# Altium PCB AUX_SteeringWheel_v4.PcbDoc
Units mil, origin at the board's own origin, x right, y up, seen from the top; angles counter-clockwise.
Board outline 6882 x 5290 mil, 2 copper layers (Top Layer, Bottom Layer); 41 components, 43 nets, 238 pads, 57 vias.
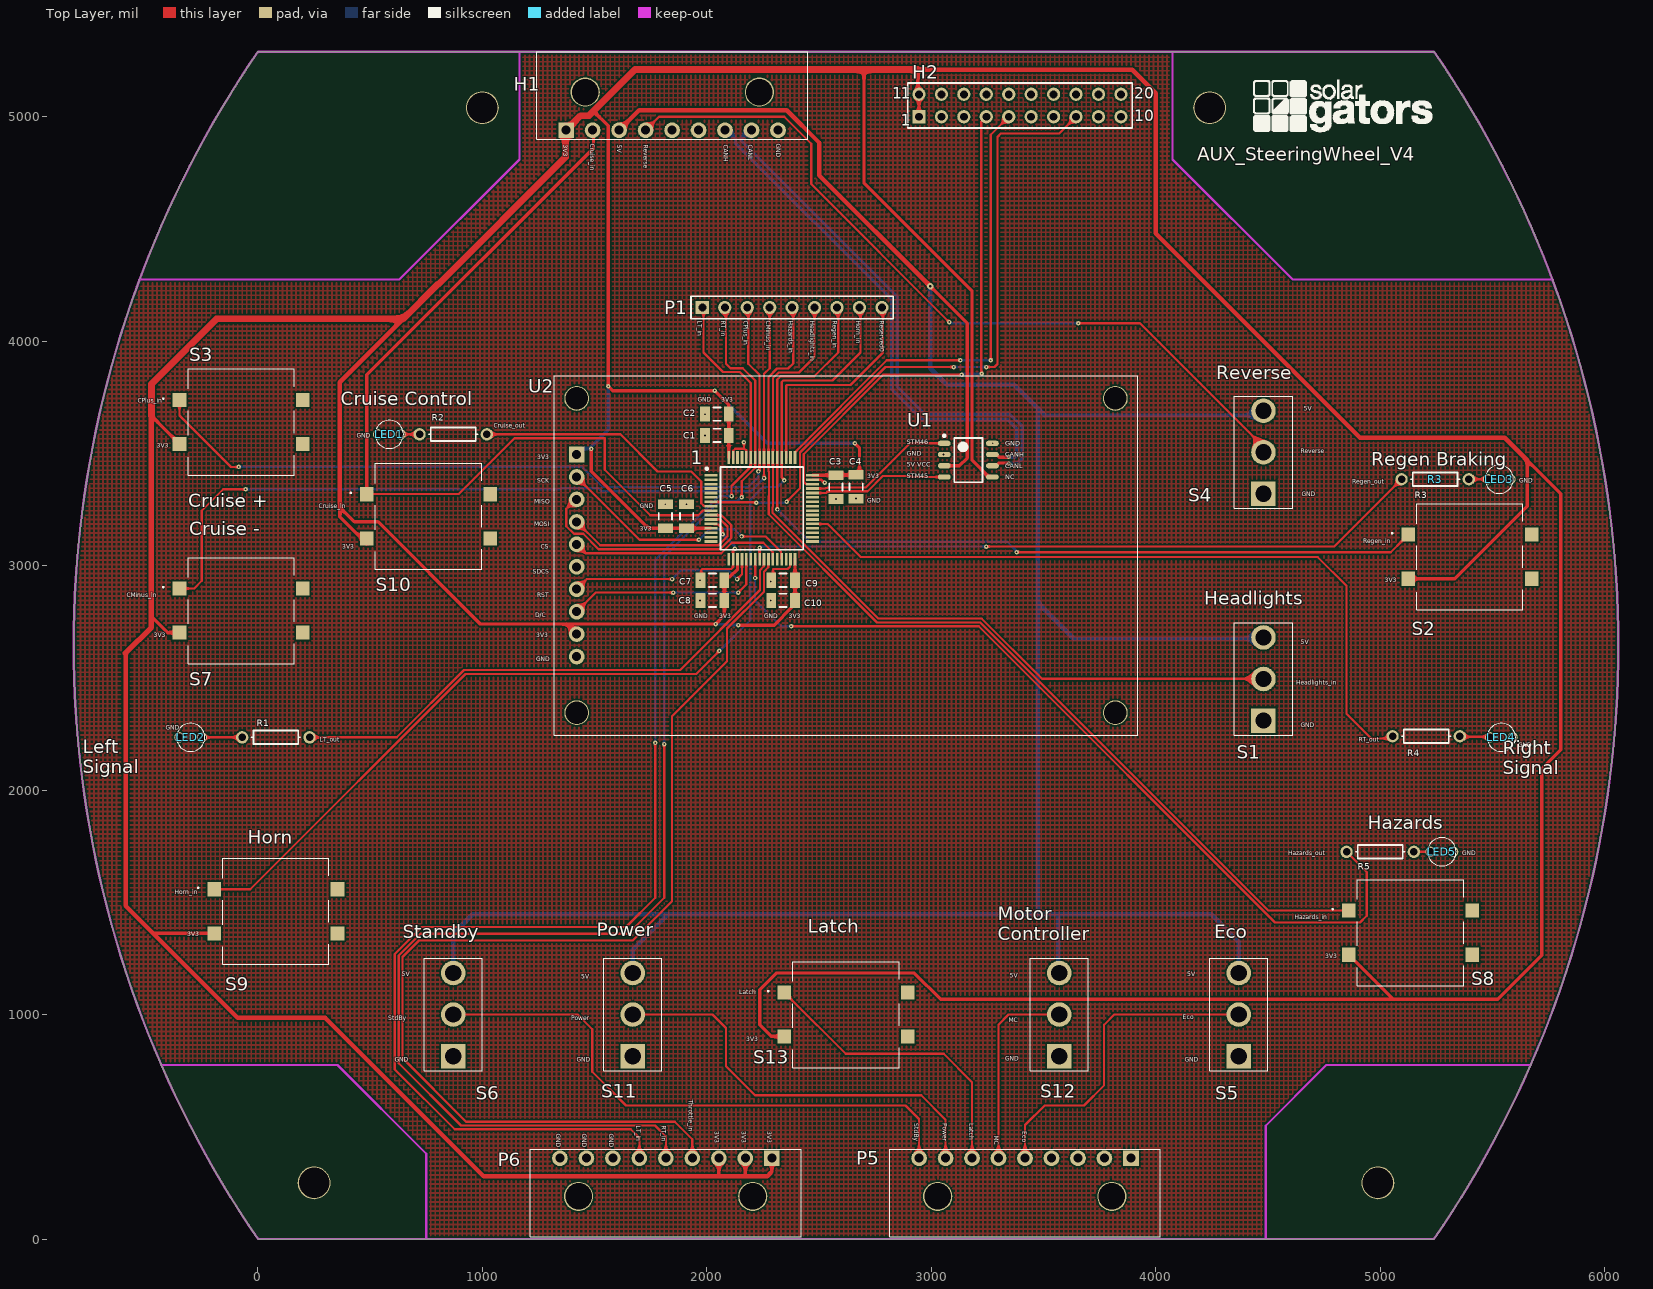
[diagram p0: Top Layer view]
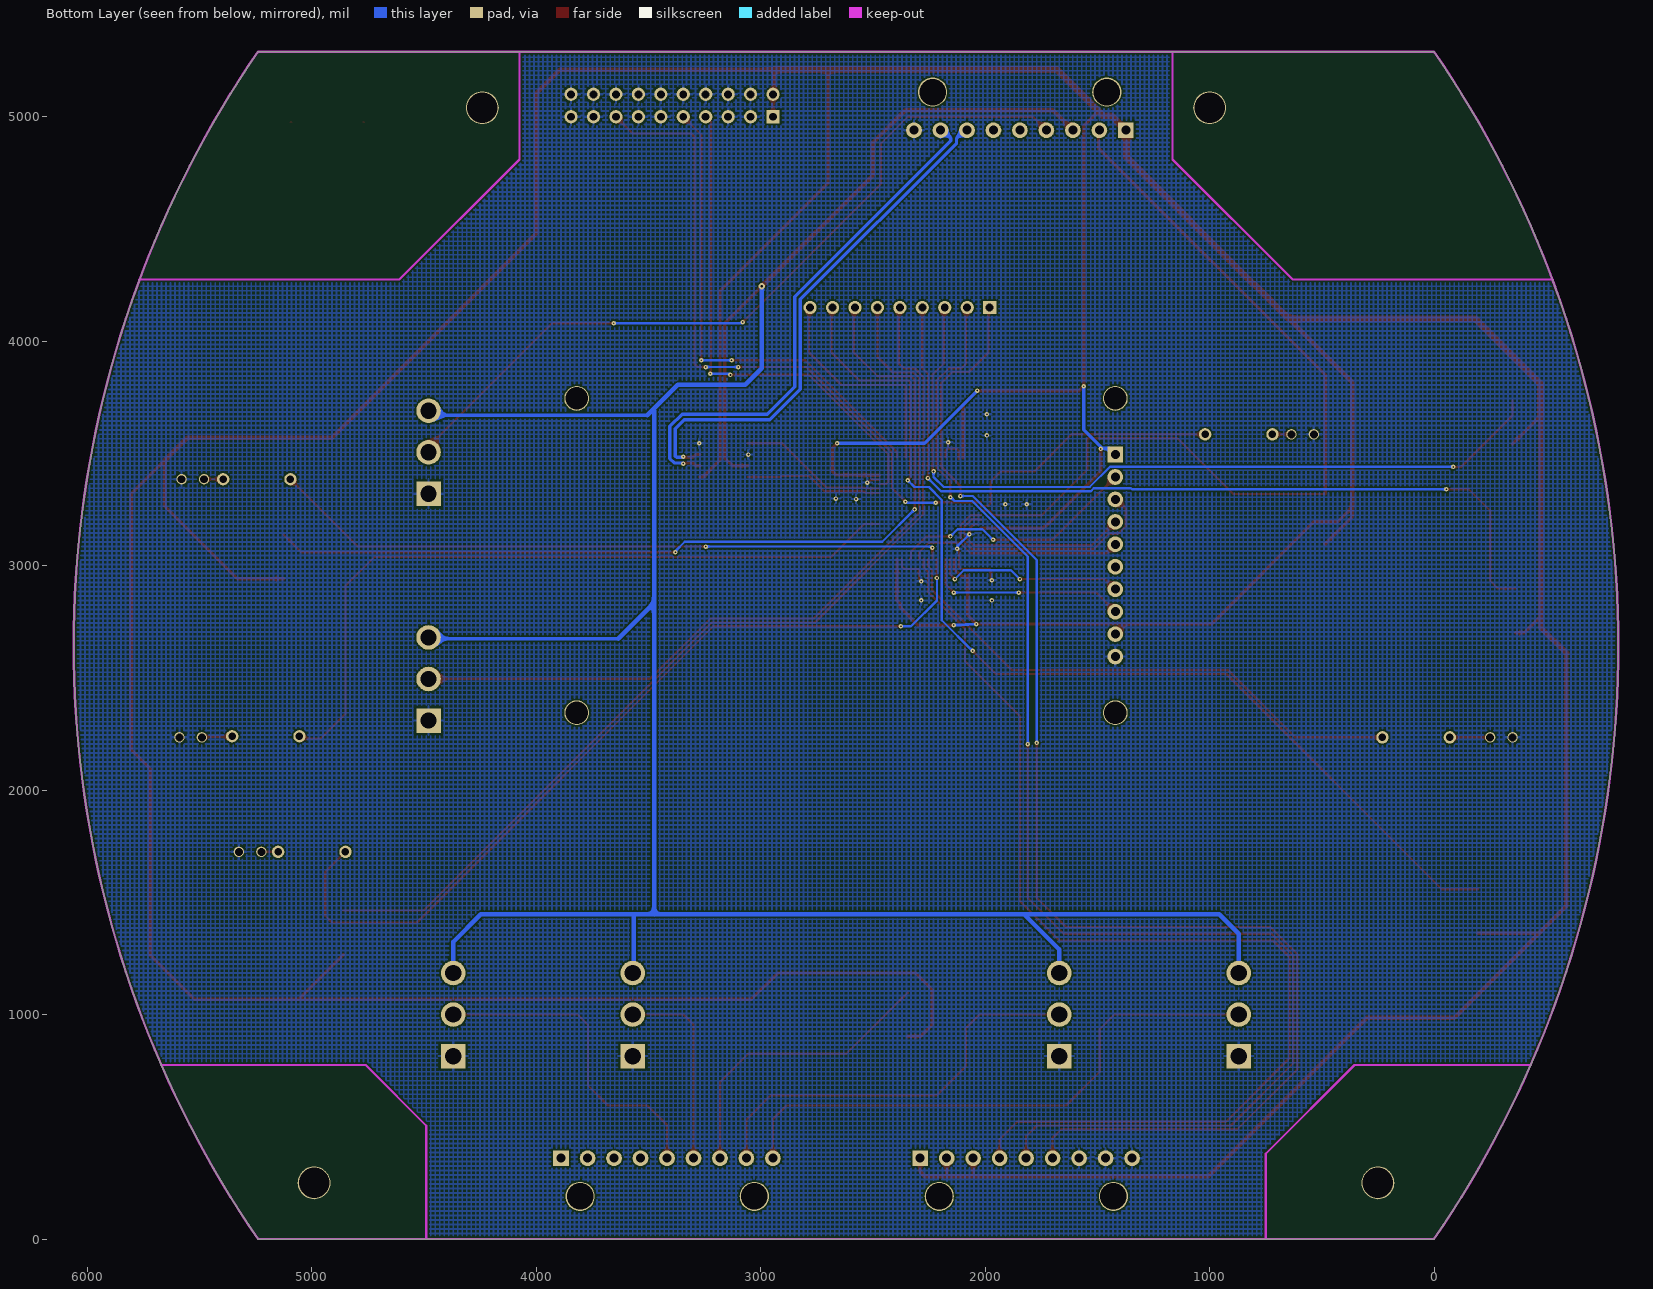
[diagram p1: Bottom Layer view, seen from below]

## Layer stack, top to bottom
Top Solder: solder mask 0.4, Solder Resist, Dk 3.5
Top Layer: signal copper 1.4
Dielectric 1: dielectric 12.6, FR-4, Dk 4.8
Bottom Layer: signal copper 1.4
Bottom Solder: solder mask 0.4, Solder Resist, Dk 3.5

## Board outline
0,0 5240,0 5239.83,0.12 ccw(c1391,2645) 5239.83,5289.88 5240,5290 0.25,5290 ccw(c3849,2645)

## Design rules (kind name [scope] priority, off if disabled: settings)
Clearance [All] p1: gap=7 ignorepadtopadclearanceinfootprint=FALSE except(6: Arc-SMDPad Arc-THPad Track-SMDPad Track-THPad)
ComponentClearance [InComponent('U2')] p1: gap=0 collisioncheckmode=3 verticalgap=10 showdistances=FALSE
DiffPairsRouting [All] p1: maxlimit=10 minlimit=10 mostfreqgap=10 toplayer_minwidth=15 toplayer_maxwidth=15 toplayer_prefwidth=15 bottomlayer_minwidth=15 bottomlayer_maxwidth=15 bottomlayer_prefwidth=15 maxuncoupledlength=500
Height [All] p1: minheight=0 maxheight=2000 prefheight=500
HoleSize [All] p1: absolutevalues=TRUE maxlimit=200 minlimit=1 maxpercent=80.000 minpercent=20.000
PolygonConnect [InNet('GND') vs InNet('GND')] p1: connectstyle=Relief reliefconductorwidth=10 reliefentries=4 polygonreliefangle="90 Angle" airgapwidth=10
RoutingVias [All] p1: holewidth=28 width=50 viastyle="Through Hole" minholewidth=28 minwidth=50 maxholewidth=28 maxwidth=50
SolderMaskExpansion [All] p1: expansion=4 istentingtop=FALSE
Width [All] p1: maxlimit=30 minlimit=10 preferedwidth=10 bottomlayer_maxwidth=20 minimp=50.000000 maximp=50.000000 favimp=50.000000
26 further rules are at their usual default settings.

## Classes and differential pairs
differential pair CAN: +CAN_P -CAN_N

## Components (designator, comment, footprint, x,y, rotation, side; value= is the part's Value field where it differs from the comment)
1 "STM32F072RBT6" QFP50P1200X1200X160-64N 2245,3255 r0 top
C1 "Cap Semi" C1206 2045,3580 r180 top value=100pF
C2 "Cap Semi" C1206 2045,3675 r180 top value=100pF
C3 "Cap Semi" C1206 2575,3350 r90 top value=100pF
C4 "Cap Semi" C1206 2665,3351.85 r90 top value=100pF
C5 "Cap Semi" C1206 1815,3220 r90 top value=100pF
C6 "Cap Semi" C1206 1910,3220 r90 top value=100pF
C7 "Cap Semi" C1206 2025,2935 r180 top value=100pF
C8 "Cap Semi" C1206 2025,2845 r180 top value=100pF
C9 "Cap Semi" C1206 2340,2935 r0 top value=100pF
C10 "Cap Semi" C1206 2340,2845 r0 top value=100pF
H1 "9-Pin Connector" Rt_Angle_9-Pin 1242.5,4900 r0 top
H2 "Header 10X2A" HDR2X10_CEN 2945,5000 r0 top
LED1 "SML-LXIL0603SIC-TR" "LED thru hole" 635.59,3585 r90 top locked
LED2 "SML-LXIL0603SIC-TR" "LED thru hole" -250,2235 r90 top locked
LED3 "SML-LXIL0603SIC-TR" "LED thru hole" 5480,3385 r270 top locked
LED4 "SML-LXIL0603SIC-TR" "LED thru hole" 5490,2235 r270 top locked
LED5 "SML-LXIL0603SIC-TR" "LED thru hole" 5225,1725 r270 top locked
P1 "Header 9" HDR1X9 1980,4150 r0 top
P5 "Header 9" Rt_Angle_9-Pin 4020,400 r180 top locked
P6 "Header 9" Rt_Angle_9-Pin 2420,400 r180 top locked
R1 "Res1" AXIAL-0.3 80,2235 r180 top value=1K
R2 "Res1" AXIAL-0.3 870,3585 r180 top value=1K
R3 "Res1" AXIAL-0.3 5245,3385 r0 top value=1K
R4 "Res1" AXIAL-0.3 5205,2240 r0 top value=1K
R5 "Res1" AXIAL-0.3 5000,1725 r0 top value=1K
S1 "SPST_1_A" 2M1SP3T1B1M2QE 4480,2310 r90 top locked
S2 "101-0624-EV" 1010624EV 5400,3040 r0 top
S3 "101-0624-EV" 1010624EV -75,3640 r0 top locked
S4 "SPST_1_A" 2M1SP3T1B1M2QE 4480,3320 r90 top locked
S5 "SPST_1_A" 2M1SP3T1B1M2QE 4370,815 r90 top locked
S6 "SPST_1_A" 2M1SP3T1B1M2QE 870,815 r90 top locked
S7 "101-0624-EV" 1010624EV -75,2800 r0 top locked
S8 "101-0624-EV" 1010624EV 5135,1365 r0 top
S9 "101-0624-EV" 1010624EV 80,1460 r0 top locked
S10 "101-0624-EV" 1010624EV 760,3220 r0 top locked
S11 "SPST_1_A" 2M1SP3T1B1M2QE 1670,815 r90 top locked
S12 "SPST_1_A" 2M1SP3T1B1M2QE 3570,815 r90 top locked
S13 "101-0624-EV" 1010624EV 2620,1000 r0 top locked
U1 "IC CAN TRANSCEIVER" "CAN TRANSCEIVER" 3165,3470 r0 top
U2 "LCD_Screen" LCD_Screen 1320,3845 r270 top locked

## Footprints (in the part's own frame and the unit in brackets; to place one, negate y for a bottom-side part, rotate by r counter-clockwise, add the part's x,y. Pads: shape width x height; smd on the part's side, far side on the other; paste and mask are expansions set on the pad)
2M1SP3T1B1M2QE [mm]
  rect 2.775x2.775 hole 1.85: 1(0,0)
  round 2.775 hole 1.85: 2(4.7,0) 3(9.4,0)
  silkscreen extent -1.65,-3.3 11.05,3.3, body extent -1.65,-3.3 11.05,3.3, height 28.2
1010624EV [mm]
  rect 1.55x1.6 smd: T1(-6.975,2.5) T2(6.975,2.5) T3(-6.975,-2.5) T4(6.975,-2.5)
  silkscreen extent -8.85,-6 6,6
AXIAL-0.3 [mm] "Axial Device, Thru-Hole; 2 Leads; 0.3 in Pin Spacing"
  round 1.4 hole 0.85: 1(-3.81,0) 2(3.81,0)
  silkscreen extent -2.77,-0.76 2.77,0.76
C1206 [mm] "Chip Capacitor, Body 3.2x1.6mm, IPC High Density"
  rect 1.1x1.7 smd: 1(-1.35,0) 2(1.35,0)
  silkscreen extent -0.4,-0.75 0.4,0.75, body extent -1.7,-0.9 1.7,0.9, height 1.3
"CAN TRANSCEIVER" [mm] "SOIC, 8-Leads, Body 4.91x3.90mm, Pitch 1.27mm, IPC Medium Density"
  oval 1.45x0.6 smd: 1(-2.725,1.905) 2(-2.725,0.635) 3(-2.725,-0.635) 4(-2.725,-1.905) 5(2.725,-1.905) 6(2.725,-0.635) 7(2.725,0.635) 8(2.725,1.905)
  silkscreen extent -2.85,-2.5 1.6,2.88, body extent -2,-2.5 2,2.5, height 1.75
HDR1X9 [mm] "Connector; Header; 9 Position"
  rect 1.5x1.5 hole 0.9: 1(0,0)
  round 1.5 hole 0.9: 2(2.54,0) 3(5.08,0) 4(7.62,0) 5(10.16,0) 6(12.7,0) 7(15.24,0) 8(17.78,0) 9(20.32,0)
  silkscreen extent -1.27,-1.27 21.59,1.27
HDR2X10_CEN [mm] "Connector; Header; 10x2 Position"
  rect 1.5x1.5 hole 0.9: 1(0,0)
  round 1.5 hole 0.9: 2(2.54,0) 3(5.08,0) 4(7.62,0) 5(10.16,0) 6(12.7,0) 7(15.24,0) 8(17.78,0) 9(20.32,0) 10(22.86,0) 11(0,2.54) 12(2.54,2.54) 13(5.08,2.54) 14(7.62,2.54) 15(10.16,2.54) 16(12.7,2.54) 17(15.24,2.54) 18(17.78,2.54) 19(20.32,2.54) 20(22.86,2.54)
  silkscreen extent -1.27,-1.27 24.13,3.81
LCD_Screen [mil]
  rect 70x70 hole 40: 1(350,100)
  round 70 hole 40: 2(450,100) 3(550,100) 4(650,100) 5(750,100) 6(850,100) 7(950,100) 8(1050,100) 9(1150,100) 10(1250,100)
  round 110 hole 100 unplated: P$1(100,100) P$2(1500,100) P$3(1500,2500) P$4(100,2500)
  silkscreen extent 0,0 1600,2600
"LED thru hole" [mil] "WP710A10QBC/D or WP7113LVBC/D"
  round 46 hole 35.43: 1(0,0) 2(0,100)
  silkscreen extent -63,-13 63,113
QFP50P1200X1200X160-64N [mm]
  rect 1.45x0.3 smd: 1(-5.75,3.75) 2(-5.75,3.25) 3(-5.75,2.75) 4(-5.75,2.25) 5(-5.75,1.75) 6(-5.75,1.25) 7(-5.75,0.75) 8(-5.75,0.25) 9(-5.75,-0.25) 10(-5.75,-0.75) 11(-5.75,-1.25) 12(-5.75,-1.75) 13(-5.75,-2.25) 14(-5.75,-2.75) 15(-5.75,-3.25) 16(-5.75,-3.75) 33(5.75,-3.75) 34(5.75,-3.25) 35(5.75,-2.75) 36(5.75,-2.25) 37(5.75,-1.75) 38(5.75,-1.25) 39(5.75,-0.75) 40(5.75,-0.25) 41(5.75,0.25) 42(5.75,0.75) 43(5.75,1.25) 44(5.75,1.75) 45(5.75,2.25) 46(5.75,2.75) 47(5.75,3.25) 48(5.75,3.75)
  rect 0.3x1.45 smd: 17(-3.75,-5.75) 18(-3.25,-5.75) 19(-2.75,-5.75) 20(-2.25,-5.75) 21(-1.75,-5.75) 22(-1.25,-5.75) 23(-0.75,-5.75) 24(-0.25,-5.75) 25(0.25,-5.75) 26(0.75,-5.75) 27(1.25,-5.75) 28(1.75,-5.75) 29(2.25,-5.75) 30(2.75,-5.75) 31(3.25,-5.75) 32(3.75,-5.75) 49(3.75,5.75) 50(3.25,5.75) 51(2.75,5.75) 52(2.25,5.75) 53(1.75,5.75) 54(1.25,5.75) 55(0.75,5.75) 56(0.25,5.75) 57(-0.25,5.75) 58(-0.75,5.75) 59(-1.25,5.75) 60(-1.75,5.75) 61(-2.25,5.75) 62(-2.75,5.75) 63(-3.25,5.75) 64(-3.75,5.75)
  silkscreen extent -6.35,-4.68 4.68,4.68, body extent -6,-6 6,6, height 1.6
Rt_Angle_9-Pin [mil]
  rect 70x70 hole 40: 1(130.5,40)
  round 70 hole 40: 2(248.5,40) 3(366.5,40) 4(484.5,40) 5(602.5,40) 6(720.5,40) 7(838.5,40) 8(956.5,40) 9(1074.5,40)
  round 130 hole 118: P$1(215.5,210) P$2(991.5,210)
  silkscreen extent 0,0 1206,390

## Part data
1: "Integrated Circuit", Manufacturer_Name=STMicroelectronics, Mouser Part Number=511-STM32F072RBT6, Datasheet Link=https://componentsearchengine.com/Datasheets/1/STM32F072RBT6.pdf, Height=1.6mm, Manufacturer_Part_Number=STM32F072RBT6, Mouser Price/Stock=https://www.mouser.com/Search/Refine.aspx?Keyword=511-STM32F072RBT6
C1 C2 C3 C4 C5 C6 C7 C8 C9 C10: "Capacitor (Semiconductor SIM Model)", LatestRevisionDate=29-May-2009, LatestRevisionNote="IPC-7351 Footprint Added.", PackageDescription="Chip Capacitor", PackageReference=C1206, Published=8-Jun-2000, Publisher="Altium Limited"
H2: "Header, 10-Pin, Dual row", LatestRevisionDate=17-Jul-2002, LatestRevisionNote="Re-released for DXP Platform.", Publisher="Altium Limited"
LED1 LED2 LED4: "Cruise", Manufacturer_Name=Lumex, Mouser2 Part Number=696-SMLLXIL0603SICTR, ComponentLink1Description=Red, ComponentLink1URL=https://www.mouser.com/ProductDetail/Lumex/SML-LXIL0603SIC-TR?qs=sGAEpiMZZMseGfSY3csMkdgyOOAg6kv2wBhnt1KKZ0Ir1Jo46E1V3Q%3D%3D, ComponentLink2Description=Green, ComponentLink2URL=https://www.mouser.com/ProductDetail/Lumex/SML-LXIL0603UPGCTR?qs=sGAEpiMZZMseGfSY3csMkdgyOOAg6kv2sRjHcnaWQfp%2F9Np9qK5zmw%3D%3D, ComponentLink3Description=Blue, ComponentLink3URL=https://www.mouser.com/ProductDetail/Lumex/SML-LXIL0603USBCTR?qs=sGAEpiMZZMseGfSY3csMkdgyOOAg6kv2YTCj%2FpdrnHQXx1e9lymIRQ%3D%3D, Datasheet Link=https://componentsearchengine.com/Datasheets/1/SML-LXIL0603SIC-TR.pdf, Height=1.15mm, Manufacturer_Part_Number=SML-LXIL0603SIC-TR, Mouser2 Price/Stock=https://www.mouser.com/Search/Refine.aspx?Keyword=696-SMLLXIL0603SICTR
LED3: "Headlights", Manufacturer_Name=Lumex, Mouser2 Part Number=696-SMLLXIL0603SICTR, ComponentLink1Description=Red, ComponentLink1URL=https://www.mouser.com/ProductDetail/Lumex/SML-LXIL0603SIC-TR?qs=sGAEpiMZZMseGfSY3csMkdgyOOAg6kv2wBhnt1KKZ0Ir1Jo46E1V3Q%3D%3D, ComponentLink2Description=Green, ComponentLink2URL=https://www.mouser.com/ProductDetail/Lumex/SML-LXIL0603UPGCTR?qs=sGAEpiMZZMseGfSY3csMkdgyOOAg6kv2sRjHcnaWQfp%2F9Np9qK5zmw%3D%3D, ComponentLink3Description=Blue, ComponentLink3URL=https://www.mouser.com/ProductDetail/Lumex/SML-LXIL0603USBCTR?qs=sGAEpiMZZMseGfSY3csMkdgyOOAg6kv2YTCj%2FpdrnHQXx1e9lymIRQ%3D%3D, Datasheet Link=https://componentsearchengine.com/Datasheets/1/SML-LXIL0603SIC-TR.pdf, Height=1.15mm, Manufacturer_Part_Number=SML-LXIL0603SIC-TR, Mouser2 Price/Stock=https://www.mouser.com/Search/Refine.aspx?Keyword=696-SMLLXIL0603SICTR
LED5: "Hazards", Manufacturer_Name=Lumex, Mouser2 Part Number=696-SMLLXIL0603SICTR, ComponentLink1Description=Red, ComponentLink1URL=https://www.mouser.com/ProductDetail/Lumex/SML-LXIL0603SIC-TR?qs=sGAEpiMZZMseGfSY3csMkdgyOOAg6kv2wBhnt1KKZ0Ir1Jo46E1V3Q%3D%3D, ComponentLink2Description=Green, ComponentLink2URL=https://www.mouser.com/ProductDetail/Lumex/SML-LXIL0603UPGCTR?qs=sGAEpiMZZMseGfSY3csMkdgyOOAg6kv2sRjHcnaWQfp%2F9Np9qK5zmw%3D%3D, ComponentLink3Description=Blue, ComponentLink3URL=https://www.mouser.com/ProductDetail/Lumex/SML-LXIL0603USBCTR?qs=sGAEpiMZZMseGfSY3csMkdgyOOAg6kv2YTCj%2FpdrnHQXx1e9lymIRQ%3D%3D, Datasheet Link=https://componentsearchengine.com/Datasheets/1/SML-LXIL0603SIC-TR.pdf, Height=1.15mm, Manufacturer_Part_Number=SML-LXIL0603SIC-TR, Mouser2 Price/Stock=https://www.mouser.com/Search/Refine.aspx?Keyword=696-SMLLXIL0603SICTR
P1 P5 P6: "Header, 9-Pin", LatestRevisionDate=17-Jul-2002, LatestRevisionNote="Re-released for DXP Platform.", Publisher="Altium Limited"
R1 R2 R3 R4 R5: "Resistor", LatestRevisionDate=17-Jul-2002, LatestRevisionNote="Re-released for DXP Platform.", PackageDescription="Axial Device, Thru-Hole; 2 Leads; 0.3 in Pin Spacing", PackageReference=AXIAL-0.3, Published=8-Jun-2000, Publisher="Altium Limited"
S1 S4 S5 S6 S11 S12: library part 2M1-SP1-T1-B1-M2QE, "Switch", Manufacturer_Name="Carling Technologies", Mouser Part Number=691-2M1-SP1-T1B1M2QE, Datasheet Link=https://componentsearchengine.com/Datasheets/1/2M1-SP1-T1-B1-M2QE.pdf, Height=28.2mm, Manufacturer_Part_Number=2M1-SP1-T1-B1-M2QE, Mouser Price/Stock=https://www.mouser.com/Search/Refine.aspx?Keyword=691-2M1-SP1-T1B1M2QE
S2 S3 S7 S8 S9 S10 S13: "Switch", Manufacturer_Name="Mountain Switch", Datasheet Link=https://componentsearchengine.com/Datasheets/1/101-0624-EV.pdf, Height=7.3mm, Manufacturer_Part_Number=101-0624-EV, Mouser Part Number=101-0624-EV, Mouser Price/Stock=https://www.mouser.com/Search/Refine.aspx?Keyword=101-0624-EV
U1: library part "CAN TRANSCEIVER"
U2: "LCD Display Screen"

## Free pads (board coordinates)
  round 146 hole 136: P$3(1000,5040) P$4(4240,5040) P$5(4990,250) P$6(250,250)

## Via types
v1: diameter 20, hole 8, Top Layer to Bottom Layer, 50 vias
v2: diameter 20, hole 7.87, Top Layer to Bottom Layer, 6 vias
v3: diameter 30, hole 10, Top Layer to Bottom Layer, 1 vias

## Nets (pads, with @x,y where several pads share a name; then routed paths per layer and width w, separated by ;. In a path a pad name is that pad's centre, name@x,y a point inside that pad or via, vN(x,y) a via of type N, cw(c..) or ccw(c..) an arc to the next point about the centre after c; other vN are vias at no path point)
3V3: 1.13 1.19 1.32 1.48 1.64 C1.1 C2.1 C3.2 C4.2 C5.1 C6.1 C7.1 C8.1 C9.2 C10.2 H1.1 H2.1 H2.11 P6.1 P6.2 P6.3 S2.T3 S3.T3 S7.T3 S8.T3 S9.T3 S10.T3 S13.T3 U1.5 U2.1 U2.9 | length 32479.8
  Top Layer w13: 2136.73,2983.79 1.19
  Top Layer w15: -475,2835 -470,2830 -470,2770 -401.57,2701.57 S7.T3@-364.61,2701.57 ; -475,3667.95 -349.61,3542.56 S3.T3 ; -465,1360 -463.43,1361.57 S9.T3 ; 362.5,3262.5 365,3260 ; S10.T3@485.39,3097.56 365,3217.95 365,3260 ; U2.9 1375,2740 ; v1(1485,3520) 1485,3420 1730,3175 1735,3175 1743.15,3166.85 C6.1 1910.22,3166.63 2018.41,3166.63 1.13 ; 1494.81,5025.19 1560.5,4959.5 v1(1560.5,3799.5) 1580,3780 v1(2035,3780) 2097.89,3717.11 C2.1@2097.89,3687.07 ; P6.3 2053.5,281.5 2055,280 ; 1.64 2097.64,3481.66 2097.64,3569.49 2098.15,3570 C2.1 C2.1@2097.89,3675.26 ; 2136.73,2983.79 2102.95,2950 2084.96,2950 2078.15,2956.81 2078.15,2950 C7.1 2078.15,2850 2078.15,2778.15 v1(2040,2740) 1410,2740 1375,2740 ; v1(2140,2735) 2300,2735 2379,2814 2379,2830.85 C10.2 C9.2 2392.89,2935.26 2392.89,3028.37 1.32 ; P6.2 2171.5,283.5 2175,280 ; 2285,295 2289.5,299.5 P6.1 ; S13.T3 2345.39,902.56 2286.23,902.56 2235,953.79 2235,1110 2310,1185 2925,1185 3041.83,1068.17 5057.82,1068.17 ; 1.48@2471.89,3403.15 2493.71,3403.15 2493.8,3403.24 2505.81,3403.24 2505.89,3403.15 C3.2 2575.93,3404.07 2664.92,3404.07 2680,3419.15 2680,3525 v1(2660,3545) ; 2700,5210 2700,4705 3181.5,4223.5 3181.5,3469.05 3255.55,3395 U1.5 ; 2940,5210 2940,5105 H2.11 H2.1 ; S8.T3 4860.39,1265.59 5057.82,1068.17 ; S2.T3 5331.57,2941.57 5655,3265 5655,3470 5805,3320 5805,2180 5720,2095 5720,1265 5523.17,1068.17 5057.82,1068.17 ; 365,3260 430,3195 535,3195 990,2740 1375,2740
  Top Layer w20: -590,2610 -590,1485 -465,1360 -90,985 300,985 1005,280 2055,280 2175,280 2270,280 2285,295 ; 365,3260 365,3800 364.78,3800.22 364.78,3816.78 647.5,4099.5 ; S10.T3@485.39,3096.57 S10.T3@485.39,3097.56 ; C2.1@2097.89,3675.26 C2.1@2097.89,3687.07 ; 2940,5210 3895,5210 4000,5105 4000,4480 4910,3570 5555,3570 5655,3470
  Top Layer w25: -590,2610 -475,2725 -475,2770 -475,2835 -475,3667.95
  Top Layer w30: -475,3667.95 -474.5,3668.45 -474.5,3809.5 -184.5,4099.5 647.5,4099.5 800.5,4252.5 ; 801.5,4251.5 1370,4820 1370,4937 H1.1 1438,5005 1474.62,5005 1494.81,5025.19 1679.62,5210 2700,5210 2940,5210
  Bottom Layer w15: U2.1 1447.5,3522.5 1477.5,3522.5 1560,3605 1560,3799 v1(1560.5,3799.5) ; v1(2035,3780) 2270,3545 v1(2660,3545) ; v1(2040,2740) v1(2140,2735)
5V: H1.3 S1.3 S4.3 S5.3 S6.3 S11.3 S12.3 U1.3 | length 12555.5
  Top Layer w15: v3(2995,4245) 3159.5,4080.5 3159.5,3479.5 3125,3445 U1.3
  Top Layer w20: H1.3 1699,5030 2027,5030 2028,5029 2356,5029 2500,4885 2500,4740 v3(2995,4245)
  Bottom Layer w15: 3505.08,3670 4474.96,3670 S4.3@4500,3695.04 ; 3634.96,2675.04 S1.3@4480,2675.04
  Bottom Layer w20: S6.3 870,1360 956.72,1446.72 1826.72,1446.72 ; S11.3 1670,1290 1826.72,1446.72 ; v3(2995,4245) 2995,3880 3069,3806 3369.08,3806 3505.08,3670 ; 3475,3690 3475,2835 ; S12.3 3565,1190.08 3565,1446.72 ; 3634.96,2675.04 3475,2835 ; S5.3 4370,1323.43 4246.72,1446.72 3565,1446.72 ; 1826.72,1446.72 3475,1446.72 ; 3475,1446.72 3565,1446.72 ; 3475,1446.72 3475,2835
CAN_N: H1.8 U1.6 | length 2412.7
  Top Layer w15: U1.6 3289.61,3445 3302.11,3457.5 3338.96,3457.5 3341.46,3455 v1(3345,3455)
  Bottom Layer w10: H1.8@2199,4906 H1.8
  Bottom Layer w15: H1.8 2187.22,4940 2152.5,4905.28 2152.5,4892.86 2848.03,4197.33 2848.03,3796.97 2970,3675 3350.36,3675 3405,3620.36 3405,3477.14 3385.36,3457.5 3347.5,3457.5 v1(3345,3455)
CAN_P: H1.7 U1.7 | length 2337.3
  Top Layer w15: U1.7 3289.61,3495 3302.11,3482.5 3342.5,3482.5 v1(3345,3485)
  Bottom Layer w15: H1.7 2092.78,4940 2127.5,4905.28 2127.5,4882.5 2823.03,4186.97 2823.03,3786.62 2959.64,3650 3340,3650 3380,3610 3380,3487.5 3375,3482.5 3351.04,3482.5 3348.54,3485 v1(3345,3485)
CMinus_in: 1.56 P1.4 S7.T1 | length 3787.7
  Top Layer w10: S7.T1@-364.61,2898.43 S7.T1 -283.88,2898.43 -250,2932.3 -250,3245 -155,3340 v2(-55,3340) ; v2(2255,3390) 2255,3420 2254.84,3420.16 1.56 2254.84,3854.84 2280,3880 P1.4
  Bottom Layer w10: v2@-53,3342 -53,3340 1345,3340 1350,3345 1515.96,3345 1528.96,3332 2197,3332 v2(2255,3390)
CPlus_in: 1.57 P1.3 S3.T1 | length 3579.6
  Top Layer w10: S3.T1 -349.61,3669.35 -120.26,3440 v2(-85,3440) ; P1.3 2185,4145 2185,3900 2235.16,3849.84 1.57 2235.16,3425.16 v2(2230,3420)
  Bottom Layer w10: v2(-85,3440) -84,3441 1444,3441 1534,3351 2186,3351 2230,3395 v2(2230,3420)
Cruise_in: 1.9 H1.2 S10.T1 | length 3911.2
  Top Layer w10: S10.T1 485.39,3319.41 894.41,3319.41 1143,3568 1545,3568 1545,3427.36 1747.36,3225 1961.98,3225 1983.04,3246.06 2017.72,3246.06 1.9 ; H1.2 H1.2@1495,4936
  Top Layer w15: S10.T1@485.39,3319.41 485.39,3850.39 1495,4860 H1.2@1495,4936
Cruise_out: 1.8 R2.1 | length 1190.5
  Top Layer w10: R2.1 1615,3585 1780,3420 1930,3420 1975,3375 1975,3278.14 1987.4,3265.75 1.8@2016.81,3265.75 ; 1.8@2018.62,3263.94 1.8@2016.81,3265.75 ; 1.8 2017.72,3265.75 1.8@2016.81,3265.75
Eco: P5.5 S5.2 | length 1462.2
  Top Layer w10: P5.5 3417.5,507.5 3505,595 3680,595 3770,685 3770,955 3815.04,1000.04 S5.2
GND: 1.12 1.18 1.31 1.47 1.60 1.63 C1.2 C2.2 C3.1 C4.1 C5.2 C6.2 C7.2 C8.2 C9.1 C10.1 H1.9 H2.2 H2.3 H2.6 H2.7 H2.9 H2.10 H2.12 H2.13 H2.14 H2.15 H2.16 H2.17 H2.18 H2.19 H2.20 LED1.2 LED2.2 LED3.2 LED4.2 LED5.2 P6.7 P6.8 P6.9 S1.1 S4.1 S5.1 S6.1 S11.1 S12.1 U1.2 U1.8 U2.10 | length 837.1
  Top Layer w10: C7.2 1975,2938.15 1975,2979.14 1980.86,2985 2108.41,2985 2117.05,2993.64 1.18 2117.05,3067.05 v1(2125,3075) ; 1.12@2032.19,3183.32 2051.72,3183.32 2070,3165.05 v1(2070,3140) ; 1.63@2117.14,3476.11 2117.14,3511.79 2126.27,3520.92 2166.88,3520.92 ; v1(2165,3550) 2165,3522.8 2166.88,3520.92 ; 1.60 2175.2,3482.28 2175.2,3514.8 2173,3514.8 2166.88,3520.92 ; C10.1 2290,2848.15 C10.1@2290,2845 ; C9.1 2295,2943.15 2295,2983.46 2296.54,2985 2359.65,2985 2370.17,2995.52 2370.17,3025.84 1.31 ; 1.47 2509.34,3382.95 2522.29,3370 v1(2525,3370) ; v1(3055.05,3495) U1.2 ; U1.8 v1(3273.78,3545)
  Bottom Layer w10: v1(2070,3140) 2125,3085 v1(2125,3075)
  other v1: 1970,2845 2285,2845 2285,2930 1970,2935 1815,3273.15 1910,3273.15 2575,3296.85 2665,3298.7 1991.85,3580 1991.85,3675
Hazards_in: 1.55 P1.5 S8.T1 | length 4315.2
  Top Layer w10: P1.5 2385,4145 2385,3901.17 2361.79,3877.96 2312.96,3877.96 2274.53,3839.53 1.55 2274.53,3421.05 2277,3418.58 2277,3311.04 2275.45,3309.49 2275.45,3229.24 2757.69,2747 3218,2747 4501.57,1463.43 S8.T1
Hazards_out: 1.23 R5.1 | length 3837.9
  Top Layer w10: v1(2215,2945) 2215.47,2945.47 1.23 ; v1(2375,2730) 3210.96,2730 4530.96,1410 4910,1410 4940,1440 4940,1635 R5.1
  Bottom Layer w10: v1(2215,2945) 2215,2845 2330,2730 v1(2375,2730)
Headlights_in: 1.54 P1.6 S1.2 | length 3541.4
  Top Layer w10: P1.6 2480,3930 2410.96,3860.96 2320,3860.96 2294.21,3835.17 1.54 2294.21,3261.43 2292.45,3259.66 2292.45,3236.29 2764.73,2764 3225.04,2764 3493.04,2496 4474,2496 S1.2@4480,2490
Horn_in: 1.52 P1.8 S9.T1 | length 4659.4
  Top Layer w10: S9.T1 -34.61,1558.43 924.47,2517.5 1952.5,2517.5 v1(2055,2620) ; v1(2345,3380) 2345,3382.71 2333.58,3394.12 1.52 2333.58,3818.58 2340,3825 2560,3825 2685,3950 2685,4145 P1.8
  Bottom Layer w10: v1(2055,2620) 2056.11,2620 2193,2756.89 2193,3293 2250,3350 2315,3350 v1(2345,3380)
Latch: P5.7 S13.T1 | length 1340.8
  Top Layer w10: S13.T1 2345.39,1097.44 2370.91,1071.93 2371.89,1071.93 2618.82,825 3055,825 3181.5,698.5 P5.7
LCD_CS: 1.27 U2.5 | length 958.4
  Top Layer w10: U2.5 1460,3055 2064.35,3055 2111.35,3102 2251.16,3102 2293.93,3059.22 2293.93,3028.9 1.27
LCD_D/C: 1.21 U2.8 | length 918.8
  Top Layer w10: U2.8 1505,2880 v1(1850,2880) ; v1(2140,2880) 2176.1,2916.1 1.21
  Bottom Layer w10: v1(1850,2880) v1(2140,2880)
LCD_MISO: 1.10 U2.3 | length 1105.4
  Top Layer w10: U2.3 1415,3295 1374,3254 1374,3175.95 1408.28,3141.67 1449.02,3141.67 1517.23,3073.46 2058.76,3073.46 2109,3123.69 2109,3180.97 2065.4,3224.57 2019.53,3224.57 1.10
LCD_MOSI: 1.11 U2.4 | length 863.5
  Top Layer w10: U2.4 1524.54,3090.46 2051.72,3090.46 2092,3130.73 2092,3173.93 2058.93,3207 2031.83,3207 2029.71,3204.88 2019.53,3204.88 1.11
LCD_RST: 1.20 U2.7 | length 864
  Top Layer w10: U2.7 1465,2940 v1(1845,2940) ; v1(2135,2940) 2156.23,2961.23 ; 2156.42,2961.42 1.20
  Bottom Layer w10: v1(1845,2940) 1885,2980 2095,2980 v1(2135,2940)
LCD_SCK: 1.29 U2.2 | length 1123.2
  Top Layer w10: U2.2 1700,3115 v2(1965,3115) ; v2(2155,3130) 2262.53,3130 2330.8,3061.72 2330.8,3034.24 2335,3030.04 1.29
  Bottom Layer w10: v2(1965,3115) 2012,3162 2123,3162 v2(2155,3130)
LT_in: 1.59 P1.1 P6.6 | length 6056.6
  Top Layer w10: P6.6 1699.5,450.5 1661.39,488.61 876.39,488.61 610.02,754.98 610.02,1270.02 730,1390 1640,1390 1770,1520 v1(1770,2210) ; P1.1 1985,4145 1985,3950 2072,3863 2147,3863 2195.79,3814.21 1.59 2194.88,3480.47 2194.88,3440.04 2110,3355.15 v1(2110,3310)
  Bottom Layer w10: v1(1770,2210) 1770,3025 2055,3310 v1(2110,3310)
LT_out: 1.25 R1.1 | length 2423.8
  Top Layer w10: R1.1 617.93,2235 917.93,2535 1881.11,2535 2237.2,2891.08 2237.2,2980.06 2253.94,2996.8 2253.94,3027.72 1.25
MC: P5.6 S12.2 | length 884.2
  Top Layer w10: P5.6 3299.5,955.04 3344.5,1000.04 S12.2
NetLED1_1: LED1.1 R2.2 | length 84.4
  Top Layer w10: LED1.1 R2.2
NetLED2_1: LED2.1 R1.2 | length 180
  Top Layer w10: LED2.1 R1.2
NetLED3_1: LED3.1 R3.2 | length 85
  Top Layer w10: R3.2 LED3.1
NetLED4_1: LED4.1 R4.2 | length 137.1
  Top Layer w10: R4.2 5357.5,2237.5 5487.5,2237.5 LED4.1
NetLED5_1: LED5.1 R5.2 | length 75
  Top Layer w10: R5.2 LED5.1
NRST_pgm15: 1.7 H2.8 | length 3026.9
  Top Layer w10: 1.7 2020.15,3283 v1@2222,3283 ; v1(2355,3285) 2414.83,3344.83 2414.83,3503.88 2795.96,3885 v1(3100,3885) ; v1(3245,3885) 3281.11,3885 3295,3898.89 3295,4910 3310,4925 3570,4925 H2.8
  Bottom Layer w10: v1(2220,3280) 2347.29,3280 2352.29,3285 v1(2355,3285) ; v1(3100,3885) v1(3245,3885)
Power: P5.8 S11.2 | length 1858.7
  Top Layer w10: S11.2 2024.96,1000.04 2085,940 2085,770 2215,640 2955,640 3063.5,531.5 P5.8
Regen_in: 1.53 P1.7 S2.T1 | length 4027.8
  Top Layer w10: v1(2314.45,3250.55) 2313.9,3251.1 1.53 2313.9,3828.9 2328.96,3843.96 2478.96,3843.96 2585,3950 2585,4145 P1.7 ; v1(3380,3060) 5046.97,3060 5098.9,3111.93 5099.88,3111.93 5125.39,3137.44 S2.T1
  Bottom Layer w10: v1(2314.45,3250.55) 2458,3107 3338,3107 3380,3065 v1(3380,3060)
Regen_out: 1.24 R3.1 | length 3037.8
  Top Layer w10: v1(2235,3080) 2235.08,3079.92 2235.08,3028.7 1.24 ; v1(3245,3085) 4795,3085 R3.1
  Bottom Layer w10: v1(2235,3080) 2240,3085 v1(3245,3085)
Reserved0: 1.51 P1.9 | length 1017.3
  Top Layer w10: 1.51@2354.17,3482.28 1.51 2353.27,3802.41 2355.86,3805 2640,3805 2785,3950 2785,4145 P1.9
Reverse: H1.4 S4.2 | length 3520.5
  Top Layer w10: H1.4 1787,5000 2345,5000 2465,4880 2465,4700 v1(3080,4085) ; v1(3655,4080) 3930,4080 S4.2@4500,3510
  Bottom Layer w10: v1(3080,4085) 3082.71,4085 3087.71,4080 v1(3655,4080)
RT_in: 1.58 P1.2 P6.5 | length 6127.7
  Top Layer w10: v1(1810,2205) 1810,1520 1650,1360 724.04,1360 627.02,1262.98 627.02,782.98 904.39,505.61 1769.39,505.61 1817.5,457.5 P6.5 ; P1.2 2085,4145 2085,3900 2105,3880 2160,3880 2215.47,3824.53 1.58 2215.47,3436.58 2155,3376.11 v1(2155,3305)
  Bottom Layer w10: v1(1810,2205) 1810,3040.96 2057.02,3287.98 2136.67,3287.98 2153.69,3305 v1(2155,3305) v1@2156.25,3303.75
RT_out: 1.37 R4.1 | length 3317.7
  Top Layer w10: 1.37 2538.9,3186.1 2687,3038 4722,3038 4850,2910 4850,2340 4960,2230 5034.81,2230 5044.81,2240 R4.1
Rx: 1.44 U1.4 | length 619.9
  Top Layer w10: 1.44 2531.37,3323.9 2536.98,3329.5 2544.66,3329.5 2546.51,3331.35 2716.35,3331.35 2785,3400 2908.65,3400 2913.65,3395 U1.4
StdBy: P5.9 S6.2 | length 2554.1
  Top Layer w10: S6.2 1424.96,1000.04 1490,935 1490,745 1640,595 2885,595 2945.5,534.5 P5.9
SWCLK_pgm9: 1.49 H2.5 | length 2184.4
  Top Layer w10: 1.49 2392.64,3504.02 2397.83,3509.21 2397.83,3510.92 2801.92,3915 v1(3130,3915) ; v1(3265,3915) 3265,4920 H2.5
  Bottom Layer w10: v1(3130,3915) v1(3265,3915)
SWDIO_pgm7: 1.46 H2.4 | length 2265.3
  Top Layer w10: 1.46 2470.47,3364.17 2440.15,3364.17 2440.15,3366.05 2438.28,3366.05 2431.83,3372.49 2431.83,3496.83 2785,3850 v1(3135,3850) ; v1(3225,3855) 3225,3857.71 3223,3859.71 3223,4978 H2.4
  Bottom Layer w10: v1(3135,3850) 3140,3855 v1(3225,3855)
Throttle_in: 1.26 P6.4 | length 4981.3
  Top Layer w10: P6.4 1935.5,444.5 1857.39,522.61 927.39,522.61 644.02,805.98 644.02,1255.94 718.08,1330 1670,1330 1845,1505 1845,2328.89 2090,2573.89 2090,2719.85 2254.2,2884.04 2254.2,2973.02 2273.62,2992.45 2273.62,3027.72 1.26
Tx: 1.45 U1.1 | length 669.8
  Top Layer w10: 1.45 2527.02,3343.58 2529.94,3346.5 2537.62,3346.5 2539.47,3348.35 2708.35,3348.35 2905,3545 U1.1
pads on no net: 1.1 1.2 1.3 1.4 1.5 1.6 1.14 1.15 1.16 1.17 1.22 1.28 1.30 1.33 1.34 1.35 1.36 1.38 1.39 1.40 1.41 1.42 1.43 1.50 1.61 1.62 H1.5 H1.6 H1.P$1 H1.P$2 P5.1 P5.2 P5.3 P5.4 P5.P$1 P5.P$2 P6.P$1 P6.P$2 S2.T2 S2.T4 S3.T2 S3.T4 S7.T2 S7.T4 S8.T2 S8.T4 S9.T2 S9.T4 S10.T2 S10.T4 S13.T2 S13.T4 U2.6 U2.P$1 U2.P$2 U2.P$3 U2.P$4

## Polygon pours and split planes (outlines as drawn)
GND on Bottom Layer "GND_L02_P064" (hatched 90Degree grid 20 track 8, remove dead copper, pour order 64): -4.77,-1.55 cw(c3849,2645) -533.85,4271.78 cw(c-530,4275) -530.81,4279.95 cw(c3849,2645) -4.77,5291.55 cw(c0,5290) 0,5295.02 5240,5295.02 cw(c5240,5290) 5244.77,5291.55 cw(c1391,2645) 5770.81,4279.95 cw(c5770,4275) 5775.02,4275 cw(c5770,4275) 5773.85,4271.78 cw(c1391,2645) 6066.02,2645 cw(c1391,2645) 5244.77,-1.55 cw(c5240,0) 5240,-5.02 0,-5.02 cw(c0,0)
no net on Top Layer "NONET_L01_P066" (hatched 90Degree grid 20 track 8, pour order 66): -4.77,-1.55 cw(c3849,2645) -533.85,4271.78 cw(c-530,4275) -530.81,4279.95 cw(c3849,2645) -4.77,5291.55 cw(c0,5290) 0,5295.02 5240,5295.02 cw(c5240,5290) 5244.77,5291.55 cw(c1391,2645) 5770.81,4279.95 cw(c5770,4275) 5775.02,4275 cw(c5770,4275) 5773.85,4271.78 cw(c1391,2645) 6066.02,2645 cw(c1391,2645) 5244.77,-1.55 cw(c5240,0) 5240,-5.02 0,-5.02 cw(c0,0)

## Keep-outs
Keep-Out Layer:
  lines w10: -530,4275 630,4275 1165,4810 1165,5290 ; -430,775 355,775 750,380 750,0 ; -280,775 -275,775 ; 0,0 5240,0 ; 0,5290 5240,5290 ; 0.17,0.12 cw(c3849,2645) 0.25,5290 ; 4075,5290 4075,4810 4610,4275 5770,4275 ; 4490,0 4490,500 4490,505 4750,765 4760,775 5670,775 ; 5239.83,0.12 ccw(c1391,2645) 5239.83,5289.88

## Other copper
Top Layer:
  pour cut-out: -430,775 355,775 750,380 750,0 -0.12,0.12 -315,315
  pour cut-out: 5239.83,0.12 5239.71,0 4490,0 4490,500 4760,770 4760,775 5670,775 5660,765 5660,590
  pour cut-out: 4075,5290 4075,4810 4610,4275 5770.63,4275 5770,4275.63 5770,4835 5694.71,4835 5239.83,5289.88
  pour cut-out: -527.3,4275 630,4275 1165,4810 1165,5290 -70,5290 -220,5140

## Silkscreen, mask and mechanical layers (free items; w line width, h text height)
Top Overlay:
  drawing of 2658 lines, arcs and shapes, not listed
  text "Cruise_in" at 1480,4880 h20 r270
  text "GND" at 2310,4880 h20 r270
  text "3V3" at 1360,4875 h20 r270
  text "5V" at 1600,4875 h20 r270
  text "Reverse" at 1720,4875 h20 r270
  text "CANH" at 2075,4875 h20 r270
  text "CANL" at 2185,4875 h20 r270
  text "AUX_SteeringWheel_V4" at 4185,4805 h60
  text "LT_in" at 1960,4091.17 h20 r270
  text "RT_in" at 2065,4091.17 h20 r270
  text "CPlus_in" at 2165,4091.17 h20 r270
  text "CMinus_in" at 2265,4091.17 h20 r270
  text "Hazards_in" at 2365,4091.17 h20 r270
  text "Headlights_in" at 2460,4091.17 h20 r270
  text "Regen_in" at 2560,4091.17 h20 r270
  text "Horn_in" at 2665,4091.17 h20 r270
  text "Reserved0" at 2770,4091.17 h20 r270
  text "Reverse" at 4270,3830 h60
  text "GND" at 1960,3730 h20
  text "3V3" at 2065,3730 h20
  text "CPlus_in" at -535,3725 h20
  text "Cruise Control" at 370,3715 h60
  text "5V" at 4660,3690 h20
  text "Cruise_out" at 1050,3615 h20
  text "GND" at 440,3570 h20
  text "3V3" at -450,3525 h20
  text "Reverse" at 4645,3500 h20
  text "3V3" at 1245,3475 h20
  text "Regen Braking" at 4960,3445 h60
  text "3V3" at 2715,3390 h20
  text "SCK" at 1245,3370 h20
  text "GND" at 5620,3370 h20
  text "Regen_out" at 4875,3365 h20
  text "GND" at 4650,3310 h20
  text "R3" at 5155,3300 h30
  text "GND" at 2715,3280 h20
  text "MISO" at 1230,3275 h20
  text "Cruise +" at -310,3260 h60
  text "Cruise_in" at 270,3255 h20
  text "GND" at 1700,3255 h20
  text "MOSI" at 1230,3175 h20
  text "3V3" at 1700,3155 h20
  text "Cruise -" at -305,3135 h60
  text "Regen_in" at 4925,3100 h20
  text "3V3" at 375,3075 h20
  text "CS" at 1260,3075 h20
  text "SDCS" at 1225,2965 h20
  text "3V3" at 5020,2925 h20
  text "CMinus_in" at -585,2860 h20
  text "RST" at 1245,2860 h20
  text "Headlights" at 4215,2825 h60
  text "D/C" at 1235,2770 h20
  text "GND" at 1945,2765 h20
  text "3V3" at 2055,2765 h20
  text "GND" at 2255,2765 h20
  text "3V3" at 2365,2765 h20
  text "3V3" at -465,2680 h20
  text "3V3" at 1240,2680 h20
  text "5V" at 4645,2650 h20
  text "GND" at 1240,2575 h20
  text "Headlights_in" at 4625,2470 h20
  text "GND" at 4645,2280 h20
  text "GND" at -410,2270 h20
  text "LT_out" at 275,2215 h20
  text "RT_out" at 4905,2215 h20
  text "GND" at 5615,2190 h20
  text "Left / Signal" at -780,2075 h60
  text "Right / Signal" at 5545,2070 h60
  text "Hazards" at 4945,1825 h60
  text "Horn" at -45,1760 h60
  text "Hazards_out" at 4590,1710 h20
  text "GND" at 5365,1710 h20
  text "Horn_in" at -370,1535 h20
  text "Hazards_in" at 4620,1425 h20
  text "Latch" at 2450,1365 h60
  text "3V3" at -315,1350 h20
  text "Power" at 1510,1350 h60
  text "Standby" at 645,1340 h60
  text "Eco" at 4260,1340 h60
  text "Motor / Controller" at 3295,1330 h60
  text "3V3" at 4755,1250 h20
  text "5V" at 640,1170 h20
  text "5V" at 4140,1170 h20
  text "5V" at 3350,1165 h20
  text "5V" at 1440,1160 h20
  text "Latch" at 2145,1090 h20
  text "Eco" at 4120,980 h20
  text "StdBy" at 580,975 h20
  text "Power" at 1395,975 h20
  text "MC" at 3345,965 h20
  text "3V3" at 2175,880 h20
  text "GND" at 3330,795 h20
  text "GND" at 610,790 h20
  text "GND" at 1420,790 h20
  text "GND" at 4130,790 h20
  text "Throttle_in" at 1920,620 h20 r270
  text "StdBy" at 2925,515 h20 r270
  text "Power" at 3050,515 h20 r270
  text "Latch" at 3170,515 h20 r270
  text "LT_in" at 1685,505 h20 r270
  text "RT_in" at 1800,505 h20 r270
  text "3V3" at 2035,480 h20 r270
  text "3V3" at 2155,480 h20 r270
  text "3V3" at 2270,480 h20 r270
  text "Eco" at 3405,480 h20 r270
  text "GND" at 1330,470 h20 r270
  text "GND" at 1445,470 h20 r270
  text "GND" at 1565,470 h20 r270
  text "MC" at 3280,460 h20 r270

## Text inside footprints (layer, text, board x,y; h text height)
H2: Top Overlay "20" at 3905,5080 h50; Top Overlay "10" at 3905,4980 h50; Top Overlay "1" at 2865,5080 h50; Top Overlay "1" at 2825,5080 h50; Top Overlay "1" at 2865,4960 h50
U1: Top Overlay "STM46" at 2890,3540 h21.65; Top Overlay "GND" at 2890,3490 h21.65; Top Overlay "5V VCC" at 2890,3440 h21.65; Top Overlay "NC" at 3330,3385 h21.65; Top Overlay "CANL" at 3330,3435 h21.65; Top Overlay "CANH" at 3330,3485 h21.65; Top Overlay "GND" at 3330,3535 h21.65; Top Overlay "STM45" at 2890,3390 h21.65